# Altium PCB Open Lamborghino.PcbDoc
Units mm, origin at the board's own origin, x right, y up, seen from the top; angles counter-clockwise.
Board outline 100.01 x 100 mm, 2 copper layers (Top, Bottom), stack 1.57 mm thick; 16 components, 38 nets, 127 pads, 28 vias.
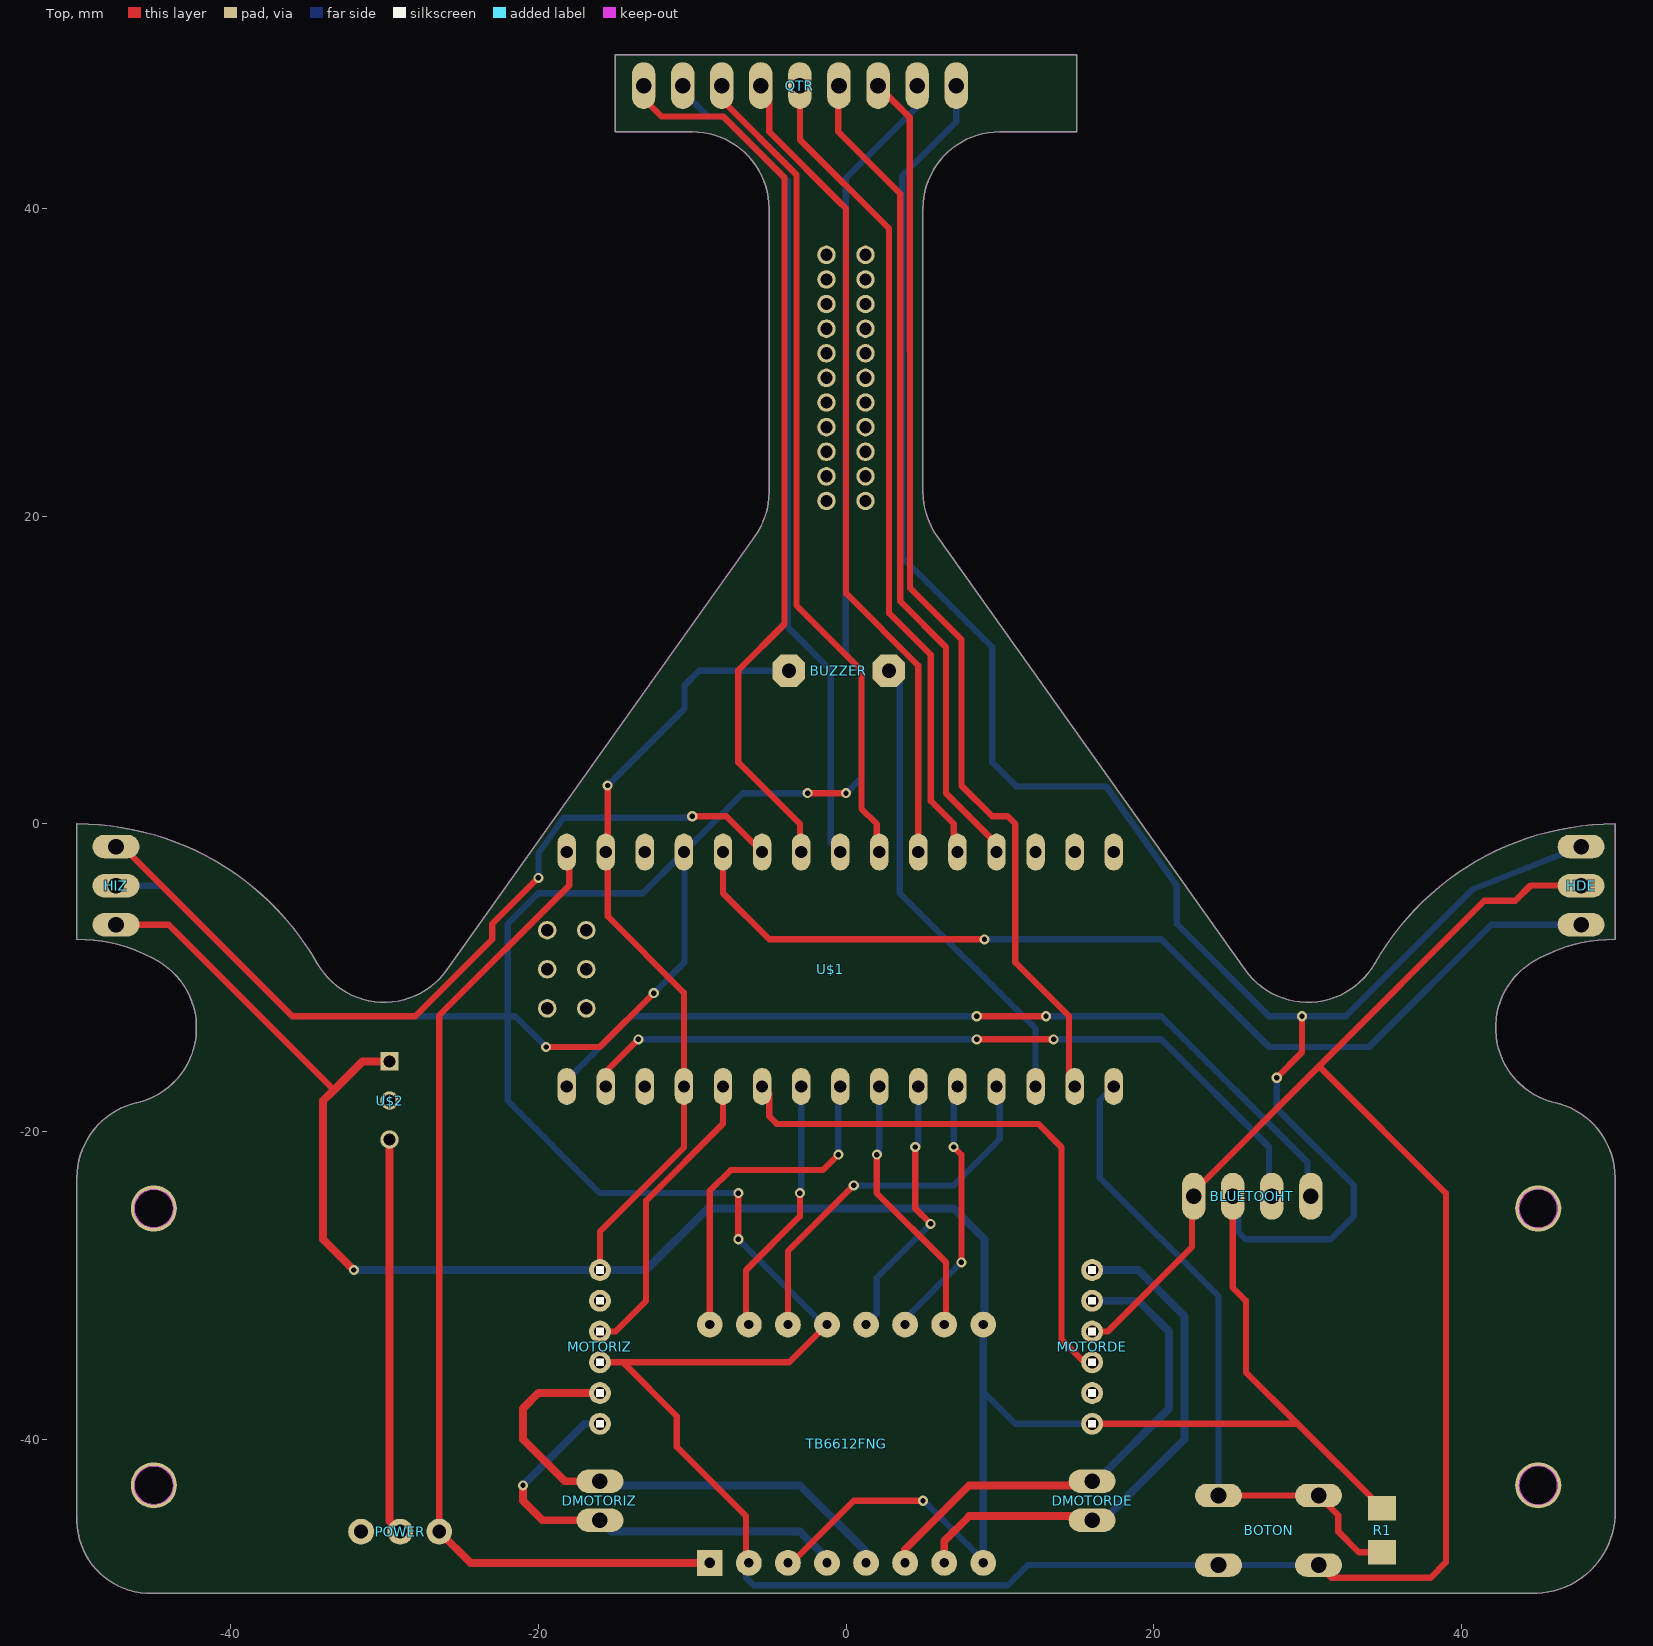
[diagram p0: Top view]
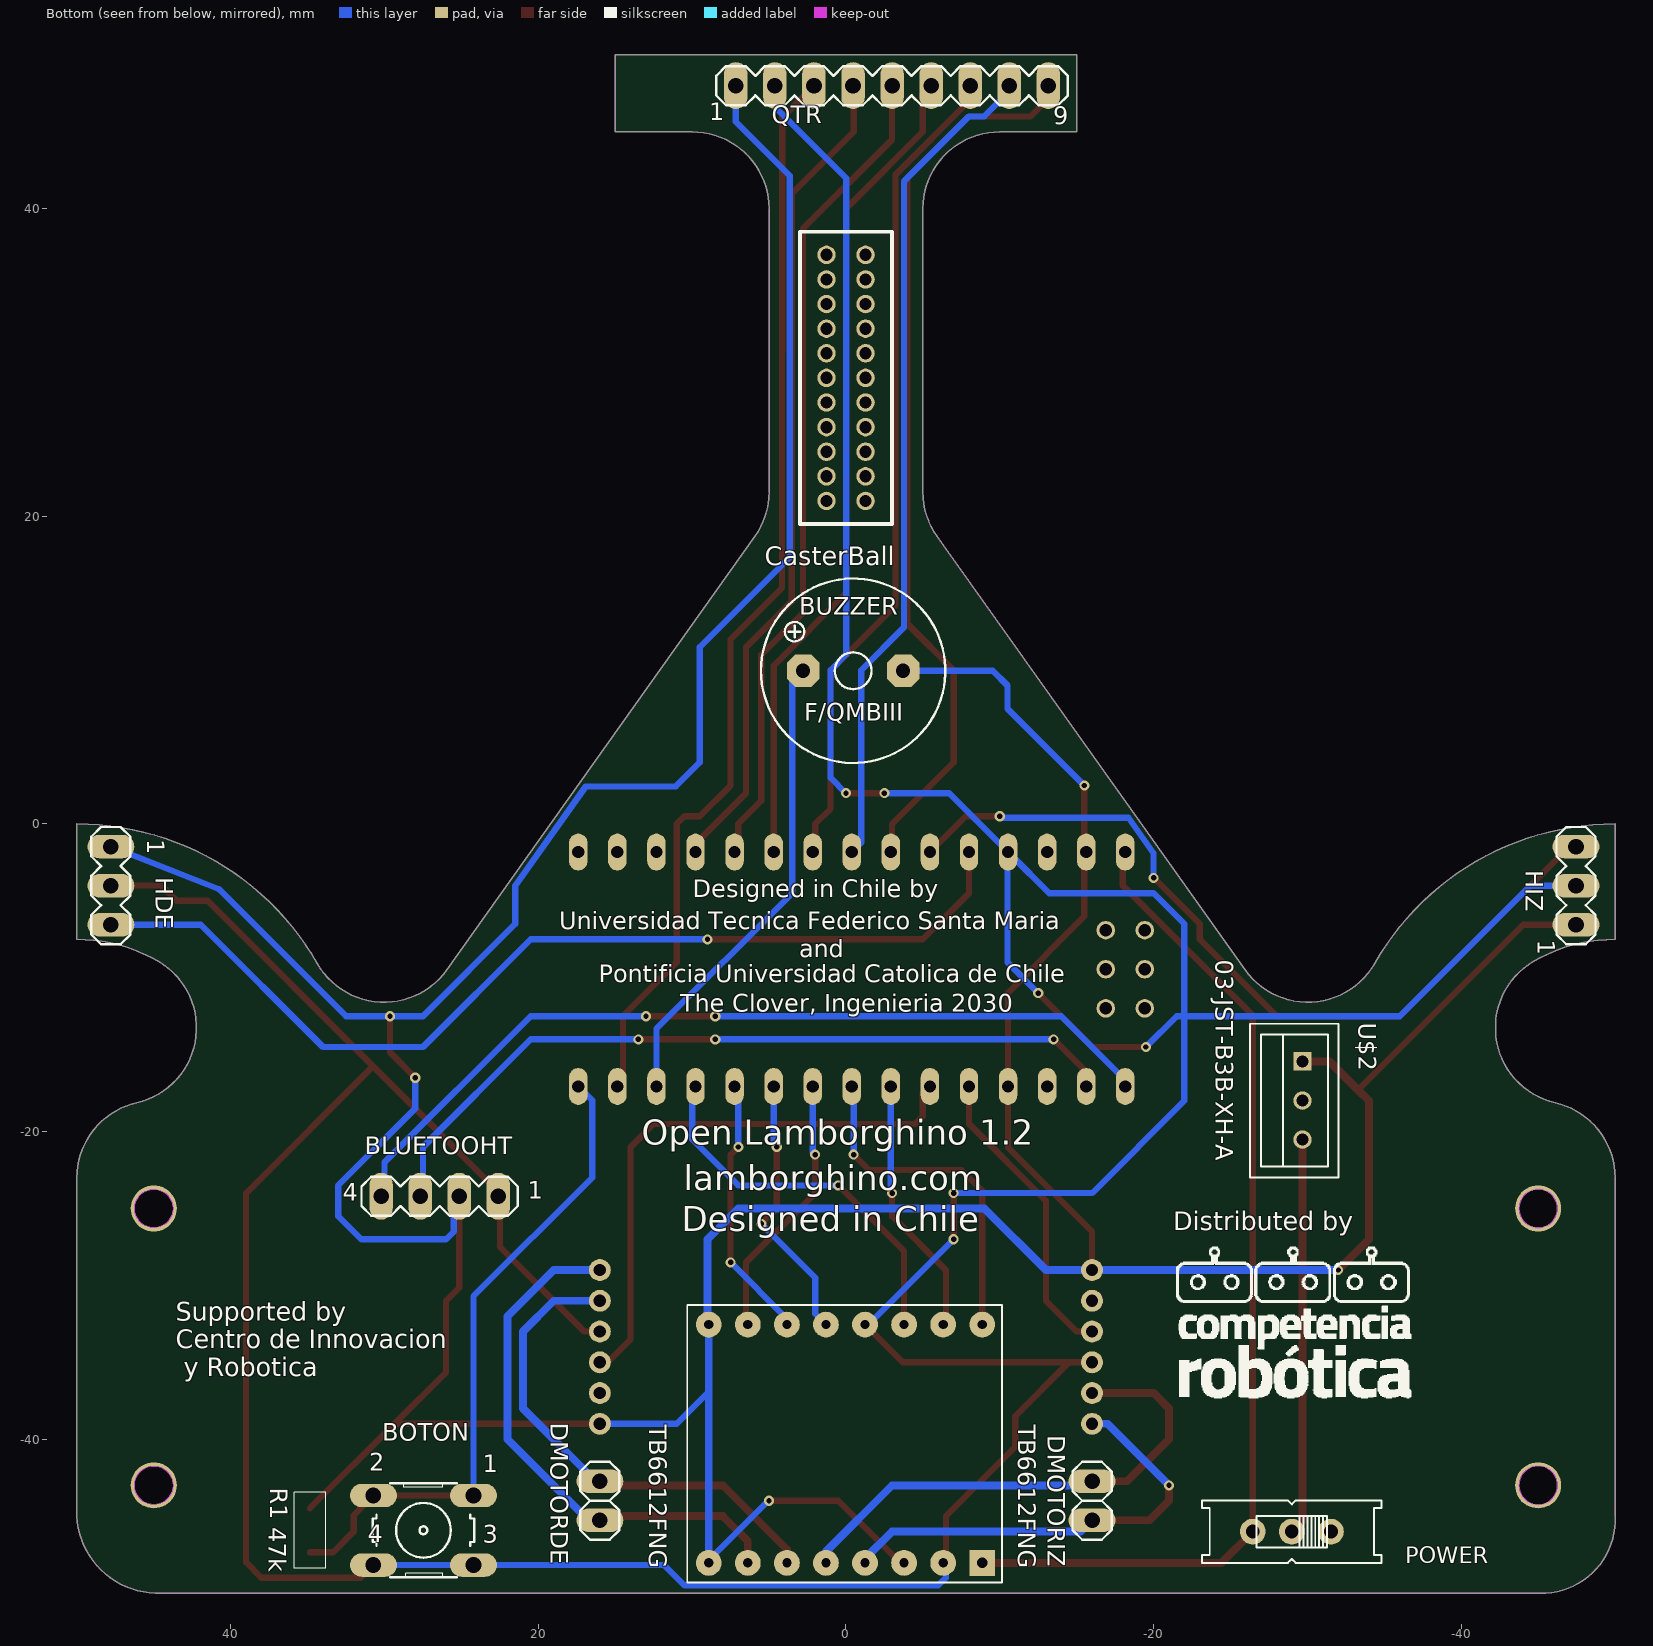
[diagram p1: Bottom view, seen from below]

## Layer stack, top to bottom
Top Solder: solder mask 0.0102, Solder Resist, Dk 3.5
Top: signal copper 0.035
Dielectric 1: core 1.5, FR-4, Dk 4.8
Bottom: signal copper 0.035
Bottom Solder: solder mask 0.0102, Solder Resist, Dk 3.5

## Board outline
44.704,-8.934 cw(c50,-18) 50,-7.5 50,0 ccw(c49.999,-17.999) 34.37,-9.072 cw(c30.028,-6.592) 25.952,-9.489 5.924,18.699 cw(c10.001,21.596) 5,21.595 5,40 cw(c10,40) 10,45 15,45 15,50 -15,50 -15,45 -10,45 cw(c-10,40) -5,40 -5,21.595 cw(c-10.001,21.596) -5.924,18.699 -25.952,-9.489 cw(c-30.028,-6.592) -34.37,-9.072 ccw(c-49.999,-17.999) -50,0 -50,-7.5 cw(c-50,-18) -44.704,-8.934 cw(c-47.226,-13.251) -46.113,-18.126 ccw(c-45,-23) -50,-23 -50,-45 ccw(c-45.25,-45.25) -45.5,-50 44.5,-50 ccw(c44.75,-44.75) 50,-45 50,-23 ccw(c45,-23) 46.113,-18.126 cw(c47.226,-13.251)
cut-out: 46.25,-43 ccw(c45,-43) 45,-41.75 ccw(c45,-43) 43.75,-43 ccw(c45,-43) 45,-44.25 ccw(c45,-43)
cut-out: -46.25,-43 cw(c-45,-43) -45,-41.75 cw(c-45,-43) -43.75,-43 cw(c-45,-43) -45,-44.25 cw(c-45,-43)
cut-out: -46.25,-25 cw(c-45,-25) -45,-23.75 cw(c-45,-25) -43.75,-25 cw(c-45,-25) -45,-26.25 cw(c-45,-25)
cut-out: 46.25,-25 ccw(c45,-25) 45,-23.75 ccw(c45,-25) 43.75,-25 ccw(c45,-25) 45,-26.25 ccw(c45,-25)
cut-out: 46.25,-43 ccw(c45,-43) 45,-41.75 ccw(c45,-43) 43.75,-43 ccw(c45,-43) 45,-44.25 ccw(c45,-43)

## Design rules (kind name [scope] priority, off if disabled: settings)
Clearance [All] p1: gap=0.152 ignorepadtopadclearanceinfootprint=FALSE
Clearance "Clearance (Same Net)" [All] p2: gap=0 ignorepadtopadclearanceinfootprint=FALSE
HoleSize HoleSize_1 [All] p1: absolutevalues=TRUE maxlimit=2540 minlimit=0.305 maxpercent=80.000 minpercent=20.000
HoleSize [All] p2: absolutevalues=TRUE maxlimit=2.54 minlimit=0.025 maxpercent=80.000 minpercent=20.000
HoleToHoleClearance mdViaViaSameLayer [All] p1: gap=0.203 allowstackedmicrovias=TRUE
HoleToHoleClearance [All] p2: gap=0.254 allowstackedmicrovias=TRUE
PasteMaskExpansion mlMinCreamFrame [All] p1: expansion=0
PasteMaskExpansion [All] p2: expansion=0
PolygonConnect ThermalVias [IsVia] p1: connectstyle=Direct reliefconductorwidth=0.254 reliefentries=4 polygonreliefangle="90 Angle" airgapwidth=0.254
PolygonConnect [All] p2: connectstyle=Relief reliefconductorwidth=0.254 reliefentries=4 polygonreliefangle="90 Angle" airgapwidth=0.254
RoutingVias [All] p1: holewidth=0.711 width=1.27 viastyle="Through Hole" minholewidth=0.711 minwidth=1.27 maxholewidth=0.711 maxwidth=1.27
SilkToSilkClearance [All] p1 off: silktosilkclearance=0.254
SilkToSolderMaskClearance [IsPad] p1 off: minsilkscreentomaskgap=0.254 clearancetoexposedcopper=TRUE
SolderMaskExpansion mlMinStopFrame [All] p1: expansion=0.051
SolderMaskExpansion [All] p2: expansion=0.102
Width Width_1 [All] p1: maxlimit=2540 minlimit=0.152 preferedwidth=0.254
Width [All] p2: maxlimit=0.254 minlimit=0.254 preferedwidth=0.254
25 further rules are at their usual default settings.

## Components (designator, comment, footprint, x,y, rotation, side; value= is the part's Value field where it differs from the comment)
BLUETOOHT "" MA04-1 26.412,-24.204 r0 top
BOTON "" B3F-10XX 27.47,-45.92 r0 top
BUZZER "F/QMBIII" F/QMBIII -0.47,9.96 r0 top
CasterBall "Comment" LED -0.005,29 r180 bottom
DMOTORDE "" 1X02 16,-44 r90 top
DMOTORIZ "" 1X02 -16,-44 r90 top
HDE "" MA03-1 47.79,-4.01 r270 top
HIZ "" MA03-1 -47.46,-4.01 r90 top
MOTORDE "" 1X6 16,-29 r270 top
MOTORIZ "" 1X6 -16,-39 r90 top
POWER "" EG1218 -28.986,-46.009 r0 top
QTR "" MA09-1 -3,48 r180 top
R1 "47k" R1206 34.85,-45.92 r90 top
TB6612FNG "TB6612FNG" TB6612FNG -2.51,-40.418 r90 top
U$1 "" NANO -9.268,-11.986 r270 top
U$2 "03-JST-B3B-XH-A" B3B-XH -29.68,-17.98 r270 top

## Footprints (in the part's own frame and the unit in brackets; to place one, negate y for a bottom-side part, rotate by r counter-clockwise, add the part's x,y. Pads: shape width x height; smd on the part's side, far side on the other; paste and mask are expansions set on the pad)
1X02 [mil] "1X02"
  oval 60x120 hole 40: 1(-50,0) 2(50,0)
1X6 [mil] "1X6"
  round 56 hole 31.5: 1(0,0) 2(78.74,0) 3(157.48,0) 4(236.22,0) 5(314.96,0) 6(393.7,0)
  silkscreen extent -10,-10 404,10
B3B-XH [mil] "B3B-XH"
  rect 47.25x47.25 hole 31.5: P$1(-100,0)
  round 47.25 hole 31.5: P$2(0,0) P$3(100,0)
B3F-10XX [mil] "B3F-10XX"
  oval 120x60 hole 40: 1(-128,89) 2(128,89) 3(-128,-89) 4(128,-89)
EG1218 [mil] "EG1218"
  round 66 hole 35.43: O(-100,0) P(0,0) S(100,0)
F/QMBIII [mil] "F/QMBIII"
  oct 82.3x82.3 hole 36: +(128,0) -(-128,0)
LED [mm]
  round 1.2 hole 0.8: 1(-1.27,-8) 1(-1.27,-6.4) 1(-1.27,-4.8) 1(-1.27,-3.2) 1(-1.27,-1.6) 1(-1.27,0) 1(-1.27,1.6) 1(-1.27,3.2) 1(-1.27,4.8) 1(-1.27,6.4) 1(-1.27,8) 2(1.27,-8) 2(1.27,-6.4) 2(1.27,-4.8) 2(1.27,-3.2) 2(1.27,-1.6) 2(1.27,0) 2(1.27,1.6) 2(1.27,3.2) 2(1.27,4.8) 2(1.27,6.4) 2(1.27,8)
  silkscreen extent -3,-9.5 3,9.5
MA03-1 [mil] "MA03-1"
  oval 60x120 hole 40: 1(-100,0) 2(0,0) 3(100,0)
MA04-1 [mil] "MA04-1"
  oval 60x120 hole 40: 1(-150,0) 2(-50,0) 3(50,0) 4(150,0)
MA09-1 [mil] "MA09-1"
  oval 60x120 hole 40: 1(-400,0) 2(-300,0) 3(-200,0) 4(-100,0) 5(0,0) 6(100,0) 7(200,0) 8(300,0) 9(400,0)
NANO [mil] "NANO"
  oval 94.5x47.25 hole 31.5: 3.3V(-400,950) 5V(-400,-50) A0(-400,750) A1(-400,650) A2(-400,550) A3(-400,450) A4(-400,350) A5(-400,250) A6(-400,150) A7(-400,50) AREF(-400,850) D2(200,50) D3(200,150) D4(200,250) D5(200,350) D6(200,450) D7(200,550) D8(200,650) D9(200,750) D10(200,850) D11(200,950) D12(200,1050) D13(-400,1050) GND(-400,-250) GND1(200,-50) RAW(-400,-350) RST(-400,-150) RST1(200,-150) RX1(200,-250) TX0(200,-350)
  round 47.25 hole 31.5: ICSP1(-200,-400) ICSP2(-200,-300) ICSP3(-100,-400) ICSP4(-100,-300) ICSP5(0,-400) ICSP6(0,-300)
R1206 [mm] "R1206"
  rect 1.6x1.803 smd: 1(-1.422,0) 2(1.422,0)
  Bottom Overlay keep-out lines w0.051: -2.473,1.025 -2.473,-1.025 2.473,-1.025 2.473,1.025 -2.473,1.025
TB6612FNG [mil] "TB6612FNG"
  round 66 hole 23.62: A1(-300,-50) A2(-300,-150) AIN1(310,50) AIN2(310,150) B1(-300,-350) B2(-300,-250) BIN1(310,-150) BIN2(310,-250) GND1(-300,50) GND2(-300,-450) GND3(310,-450) PWMA(310,250) PWMB(310,-350) STBY(310,-50) VCC(-300,150)
  rect 66x66 hole 27.56: VM(-300,250)

## Part data
BLUETOOHT: library part MA04-1
BOTON: library part B3F-10XX
DMOTORDE DMOTORIZ: library part 1X02
HDE HIZ: library part MA03-1
MOTORDE MOTORIZ: library part 1X6
POWER: library part EG1218
QTR: library part MA09-1
R1: library part R1206
U$1: library part NANO
U$2: library part B3B-XH

## Free pads (board coordinates)
  round 3 hole 2.5: P1(-45,-43) P1(-45,-25) P1(45,-43) P1(45,-25)

## Via types
v1: diameter 0.655/0.655 (per signal layer), hole 0.35, Top to Bottom, 28 vias

## Nets (pads, with @x,y where several pads share a name; then routed paths per layer and width w, separated by ;. In a path a pad name is that pad's centre, name@x,y a point inside that pad or via, vN(x,y) a via of type N, cw(c..) or ccw(c..) an arc to the next point about the centre after c; other vN are vias at no path point)
3.3V: U$1.3.3V
7.4V: POWER.S TB6612FNG.VM U$1.RAW | length 66.2
  Top w0.406: POWER.S -26.446,-12.446 -18,-4 -18,-1.984 U$1.RAW
  Top w0.508: POWER.S -24.417,-48.038 TB6612FNG.VM
A01: DMOTORIZ.1 MOTORIZ.1 TB6612FNG.A1 | length 29.3
  Top w0.508: v1(-21,-43) -21,-44 -19.73,-45.27 DMOTORIZ.1
  Bottom w0.508: v1(-21,-43) -17,-39 MOTORIZ.1 ; DMOTORIZ.1 -15.27,-46 -3,-46 -1.24,-47.76 TB6612FNG.A1
A02: DMOTORIZ.2 MOTORIZ.2 TB6612FNG.A2 | length 33.5
  Top w0.508: DMOTORIZ.2 -18.27,-42.73 -21,-40 -21,-38 -20,-37 MOTORIZ.2
  Bottom w0.508: DMOTORIZ.2 -15.73,-43 -3,-43 1.3,-47.3 TB6612FNG.A2
AIN1: TB6612FNG.AIN1 U$1.D9 | length 25.1
  Top w0.406: TB6612FNG.AIN1 -3.78,-27.78 v1(0.5,-23.5)
  Bottom w0.406: v1(0.5,-23.5) 7,-23.5 10,-20.5 10,-17.284 U$1.D9
AIN2: TB6612FNG.AIN2 U$1.D4 | length 17
  Top w0.406: TB6612FNG.AIN2 -6.5,-32.364 -6.5,-29 -3,-25.5 v1(-3,-24)
  Bottom w0.406: v1(-3,-24) -2.918,-23.918 U$1.D4
AREF: U$1.AREF
B01: DMOTORDE.1 MOTORDE.1 TB6612FNG.B1 | length 35.2
  Top w0.508: TB6612FNG.B1 6.38,-46.62 8,-45 15.73,-45 DMOTORDE.1
  Bottom w0.508: DMOTORDE.1 16.27,-45 17,-45 22,-40 22,-32 19,-29 MOTORDE.1
B02: DMOTORDE.2 MOTORDE.2 TB6612FNG.B2 | length 32.7
  Top w0.508: TB6612FNG.B2 3.84,-47.16 8,-43 15.73,-43 DMOTORDE.2
  Bottom w0.508: DMOTORDE.2 16.27,-42.73 21,-38 21,-33 19,-31 MOTORDE.2
BIN1: TB6612FNG.BIN1 U$1.D7 | length 17.7
  Top w0.406: v1(4.5,-21) 4.5,-25 v1(5.5,-26)
  Bottom w0.406: TB6612FNG.BIN1 2,-31.844 2,-29.5 v1(5.5,-26) ; v1(4.5,-21) 4.702,-20.798 U$1.D7
BIN2: TB6612FNG.BIN2 U$1.D8 | length 17.3
  Top w0.406: v1(7,-21) 7.5,-21.5 v1(7.5,-28.5)
  Bottom w0.406: TB6612FNG.BIN2 3.84,-32.16 v1(7.5,-28.5) ; v1(7,-21) 7,-17.308 U$1.D8
BOTON: BOTON.1 BOTON.2 R1.1 U$1.D12 | length 42.9
  Top w0.406: BOTON.1 BOTON.2 32,-44.938 32,-46 33.342,-47.342 R1.1
  Bottom w0.406: U$1.D12 16.5,-17.968 16.5,-23 24.219,-30.719 BOTON.1
BRX: BLUETOOHT.4 U$1.TX0 | length 56.5
  Top w0.406: v1(8.5,-12.5) v1(13,-12.5)
  Bottom w0.406: U$1.TX0 -18.158,-16.658 -14,-12.5 v1(8.5,-12.5) ; v1(13,-12.5) 20.5,-12.5 30,-22 30,-23.982 BLUETOOHT.4
BTX: BLUETOOHT.3 U$1.RX1 | length 51.1
  Top w0.406: U$1.RX1 -15.618,-16.118 v1(-13.5,-14) ; v1(8.5,-14) v1(13.5,-14)
  Bottom w0.406: v1(-13.5,-14) v1(8.5,-14) ; v1(13.5,-14) 20.5,-14 27.5,-21 27.5,-24.022 BLUETOOHT.3
BUZZER: BUZZER.+ U$1.D10 | length 31
  Bottom w0.406: BUZZER.+ 3.5,9.241 3.5,-4.5 12.322,-13.322 U$1.D10
ENCDE: MOTORDE.4 U$1.D3 | length 37.1
  Top w0.406: U$1.D3 -5,-17.524 -5,-19 -4.5,-19.5 12.5,-19.5 14,-21 14,-33.5 15.5,-35 MOTORDE.4
ENCDE1: MOTORDE.5
ENCIZ: MOTORIZ.4 U$1.D2 | length 19.8
  Top w0.406: MOTORIZ.4 -15,-33 -13,-31 -13,-24.5 -8,-19.5 -8,-17.068 U$1.D2
ENCIZ1: MOTORIZ.5
GND: BLUETOOHT.2 BUZZER.- HDE.1 HIZ.1 MOTORDE.6 MOTORIZ.6 QTR.1 R1.2 TB6612FNG.GND1 TB6612FNG.GND2 TB6612FNG.GND3 U$1.GND U$1.GND1 U$2.P$1 | length 339.3
  Top w0.406: HIZ.1 -44.035,-6.55 -33.292,-17.292 ; MOTORIZ.6 -16,-26.5 -10.538,-21.038 U$1.GND1 -10.538,-10.962 -15.5,-6 U$1.GND@-15.5,-1.944 ; U$1.GND U$1.GND@-15.5,-1.944 ; v1(-15.5,2.5) U$1.GND@-15.5,-1.944 ; TB6612FNG.GND1 -3.538,-48.038 0.5,-44 v1(5,-44) ; MOTORDE.6 29.352,-39 ; BLUETOOHT.2 25.142,-30.142 26,-31 26,-35.648 29.352,-39 ; v1(28,-16.5) 29.645,-14.855 v1(29.645,-12.5) ; R1.2 29.352,-39
  Top w0.508: v1(-32,-29) -34,-27 -34,-18 -33.292,-17.292 -31.44,-15.44 U$2.P$1
  Bottom w0.406: v1(-15.5,2.5) -10.5,7.5 -10.5,9 -9.54,9.96 BUZZER.- ; v1(5,-44) 5.049,-44 TB6612FNG.GND2@8.92,-47.871 ; QTR.1 7.16,45.66 3.65,42.15 3.65,17.35 9.5,11.5 9.5,4 11.06,2.44 16.916,2.44 21.5,-4.013 21.5,-6.5 27.5,-12.5 v1(29.645,-12.5) 32.5,-12.5 40.756,-4.244 HDE.1 ; 8.92,-36.918 11.002,-39 MOTORDE.6 ; BLUETOOHT.2 25.5,-24.562 25.5,-26.5 26,-27 31.5,-27 33,-25.5 33,-23.5 28,-18.5 v1(28,-16.5)
  Bottom w0.508: v1(-32,-29) MOTORIZ.6 -13,-29 -9,-25 7,-25 9,-27 9,-32.464 TB6612FNG.GND3 8.92,-36.918 8.92,-47.871 TB6612FNG.GND2
HDE: HDE.3 U$1.A7 | length 65.9
  Top w0.406: U$1.A7 -8,-1.828 -8,-4.5 -5,-7.5 v1(9,-7.5)
  Bottom w0.406: v1(9,-7.5) 20.5,-7.5 27.5,-14.5 34,-14.5 41.95,-6.55 HDE.3
HIZ: HIZ.3 U$1.A6 | length 54.7
  Top w0.406: HIZ.3 -47.03,-1.47 -36,-12.5 -28,-12.5 -23,-7.5 -23,-6.5 v1(-20,-3.5) ; v1(-10,0.5) -7.784,0.5 U$1.A6
  Bottom w0.406: v1(-20,-3.5) -20,-1.901 -18.363,0.403 -10.097,0.403 v1(-10,0.5)
LEDON: QTR.3 U$1.D11 | length 70.9
  Top w0.406: QTR.3 4.15,45.93 4.151,15.349 7.5,12 7.5,2.5 9.5,0.5 10.5,0.5 11,0 11,-9 14.5,-12.5 14.5,-16.704 U$1.D11
LEDPIN: U$1.D13
N$3: U$2.P$2
N$4: POWER.O
PWMA: TB6612FNG.PWMA U$1.D5 | length 22.5
  Top w0.406: TB6612FNG.PWMA -8.86,-23.86 -7.5,-22.5 -1.5,-22.5 v1(-0.5,-21.5)
  Bottom w0.406: v1(-0.5,-21.5) -0.5,-17.188 U$1.D5
PWMB: TB6612FNG.PWMB U$1.D6 | length 17.5
  Top w0.406: v1(2,-21.5) 2,-24 6.5,-28.5 6.5,-32.424 TB6612FNG.PWMB
  Bottom w0.406: v1(2,-21.5) 2.162,-21.338 U$1.D6
QTR1: QTR.4 U$1.A0 | length 54.1
  Top w0.406: QTR.4 -0.5,47.96 -0.5,45 3.525,40.974 3.525,14.475 6.5,11.5 6.5,2 9.782,-1.282 U$1.A0
QTR2: QTR.5 U$1.A1 | length 54.1
  Top w0.406: QTR.5 -3,44.5 2.8,38.7 2.8,13.7 5.5,11 5.5,1.5 7,0 7,-1.584 U$1.A1
QTR3: QTR.6 U$1.A2 | length 55.8
  Top w0.406: QTR.6 -5,47.46 -5,45 -0.275,40.275 ; -1.475,41.475 0,40 0,15 4.702,10.298 U$1.A2
QTR4: QTR.7 U$1.A3 | length 54.1
  Top w0.406: QTR.7 -8.08,47.08 -3.225,42.225 -3.225,14.225 1,10 1,1 2,0 2,-1.664 U$1.A3
QTR5: QTR.8 U$1.A4 | length 54.7
  Bottom w0.406: QTR.8 -10.62,47.62 -9,46 -8,46 -3.775,41.775 -3.775,12.775 -1,10 -1,-1.204 U$1.A4
QTR6: QTR.9 U$1.A5 | length 58.9
  Top w0.406: QTR.9 -13.16,47.16 -12,46 -8,46 -4,42 -4,13 -7,10 -7,4 -3,0 -3,-1.744 U$1.A5
RST: U$1.RST
RST1: U$1.RST1
VBAT: POWER.P U$2.P$3 | length 25.8
  Top w0.508: U$2.P$3 -29.68,-45.315 POWER.P
VCC: BLUETOOHT.1 BOTON.3 BOTON.4 HDE.2 HIZ.2 MOTORDE.3 MOTORIZ.3 QTR.2 TB6612FNG.STBY TB6612FNG.VCC U$1.5V | length 326.8
  Top w0.406: v1(-19.5,-14.5) -16,-14.5 v1(-12.5,-11) ; MOTORIZ.3 -14.5,-35 ; v1(-7,-27) v1(-7,-24) ; TB6612FNG.VCC -6.5,-47.858 -6.5,-45 -11,-40.5 -11,-38.5 -14.5,-35 ; v1(-2.5,2) v1(0,2) ; TB6612FNG.STBY -3.696,-35 -14.5,-35 ; MOTORDE.3 17,-33 22.5,-27.5 22.5,-24.306 BLUETOOHT.1 22.602,-23.898 30.75,-15.75 ; BOTON.4 31.541,-49 38,-49 39,-48 39,-24 30.75,-15.75 ; HDE.2 47.78,-4 44.5,-4 43.5,-5 41.5,-5 30.75,-15.75
  Bottom w0.406: HIZ.2 -44.49,-4.01 -36,-12.5 -22,-12.5 ; v1(-19.5,-14.5) -21.5,-12.5 -22,-12.5 ; v1(-12.5,-11) -10.5,-9 -10.5,-2.247 U$1.5V@-10.73,-2.018 ; v1(-7,-27) -1.456,-32.544 TB6612FNG.STBY ; v1(-7,-24) -16,-24 -22,-18 -22,-12.5 ; TB6612FNG.VCC -6.5,-48.218 -6.5,-49 -6,-49.5 10.5,-49.5 11.819,-48.181 BOTON.3 BOTON.4 ; v1(-2.5,2) -6.712,2 U$1.5V U$1.5V@-10.73,-2.018 ; v1(0,2) 1,3 1,10 -0.025,11.025 -0.025,41.975 4.62,46.62 QTR.2 ; -22,-12.5 -22,-6.5 -20,-4.5 -13.212,-4.5 U$1.5V@-10.73,-2.018
pads on no net: CasterBall.1 CasterBall.2 U$1.ICSP1 U$1.ICSP2 U$1.ICSP3 U$1.ICSP4 U$1.ICSP5 U$1.ICSP6

## Keep-outs
Keep-Out Layer:
  the board outline again, w0.001

## Silkscreen, mask and mechanical layers (free items; w line width, h text height)
Bottom Overlay:
  drawing of 1655 lines, arcs and shapes, not listed
  text "Designed in Chile by" at 9.95,-5.15 h1.97
  text "Universidad Tecnica Federico Santa Maria" at 18.65,-7.25 h1.97
  text "and" at 3.025,-9.05 h1.97
  text "Pontificia Universidad Catolica de Chile" at 16.075,-10.675 h1.97
  text "The Clover, Ingenieria 2030" at 10.775,-12.6 h1.97
  text "Open Lamborghino 1.2" at 13.275,-21.4 h2.76
  text "lamborghino.com" at 10.55,-24.35 h2.76
  text "Distributed by" at -21.275,-26.425 h1.2
  text "Designed in Chile" at 10.675,-27.025 h2.76
  text "Supported by / Centro de Innovacion /  y Robotica" at 43.575,-35.9 h1.2
Dimension:
  circle w0.001: c45,-43 r1.25
  circle w0.001: c-45,-43 r1.25
  circle w0.001: c-45,-25 r1.25
  circle w0.001: c45,-43 r1.25
  circle w0.001: c45,-25 r1.25
  lines w0.001: -50,-45 ccw(c-45.25,-45.25) -45.5,-50 44.5,-50 ccw(c44.75,-44.75) 50,-45 50,-23 ccw(c45,-23) 46.113,-18.126 cw(c47.226,-13.251) 44.704,-8.934 cw(c50,-18) 50,-7.5 50,0 ccw(c49.999,-17.999) 34.37,-9.072 cw(c30.028,-6.592) 25.952,-9.489 5.924,18.699 cw(c10.001,21.596) 5,21.595 5,40 cw(c10,40) 10,45 15,45 15,50 -15,50 -15,45 -10,45 cw(c-10,40) -5,40 -5,21.595 cw(c-10.001,21.596) -5.924,18.699 -25.952,-9.489 cw(c-30.028,-6.592) -34.37,-9.072 ccw(c-49.999,-17.999) -50,0 -50,-7.5 cw(c-50,-18) -44.704,-8.934 cw(c-47.226,-13.251) -46.113,-18.126 ccw(c-45,-23) -50,-23 -50,-45

## Text inside footprints (layer, text, board x,y; h text height)
BLUETOOHT: Bottom Overlay "1" at 20.7,-24.75 h1.97; Bottom Overlay "4" at 32.7,-24.875 h1.97
BOTON: Bottom Overlay "1" at 23.625,-42.525 h1.97; Bottom Overlay "2" at 31,-42.425 h1.97; Bottom Overlay "3" at 23.6,-47.125 h1.97; Bottom Overlay "4" at 31.1,-47.075 h1.97
HDE: Bottom Overlay "1" at 45.8,-1 h1.97 r90
HIZ: Bottom Overlay "1" at -44.575,-7.525 h1.97 r90
QTR: Bottom Overlay "1" at 8.9,45.375 h1.97; Bottom Overlay "9" at -13.482,45.104 h1.97